# Altium PCB mchf_pro_trsv.PcbDoc
Units mil, origin at the board's own origin, x right, y up, seen from the top; angles counter-clockwise.
Board outline 3781.46 x 2216.74 mil, 2 copper layers (Top Layer, Bottom Layer); 16 components, 87 nets, 218 pads, 86 vias.
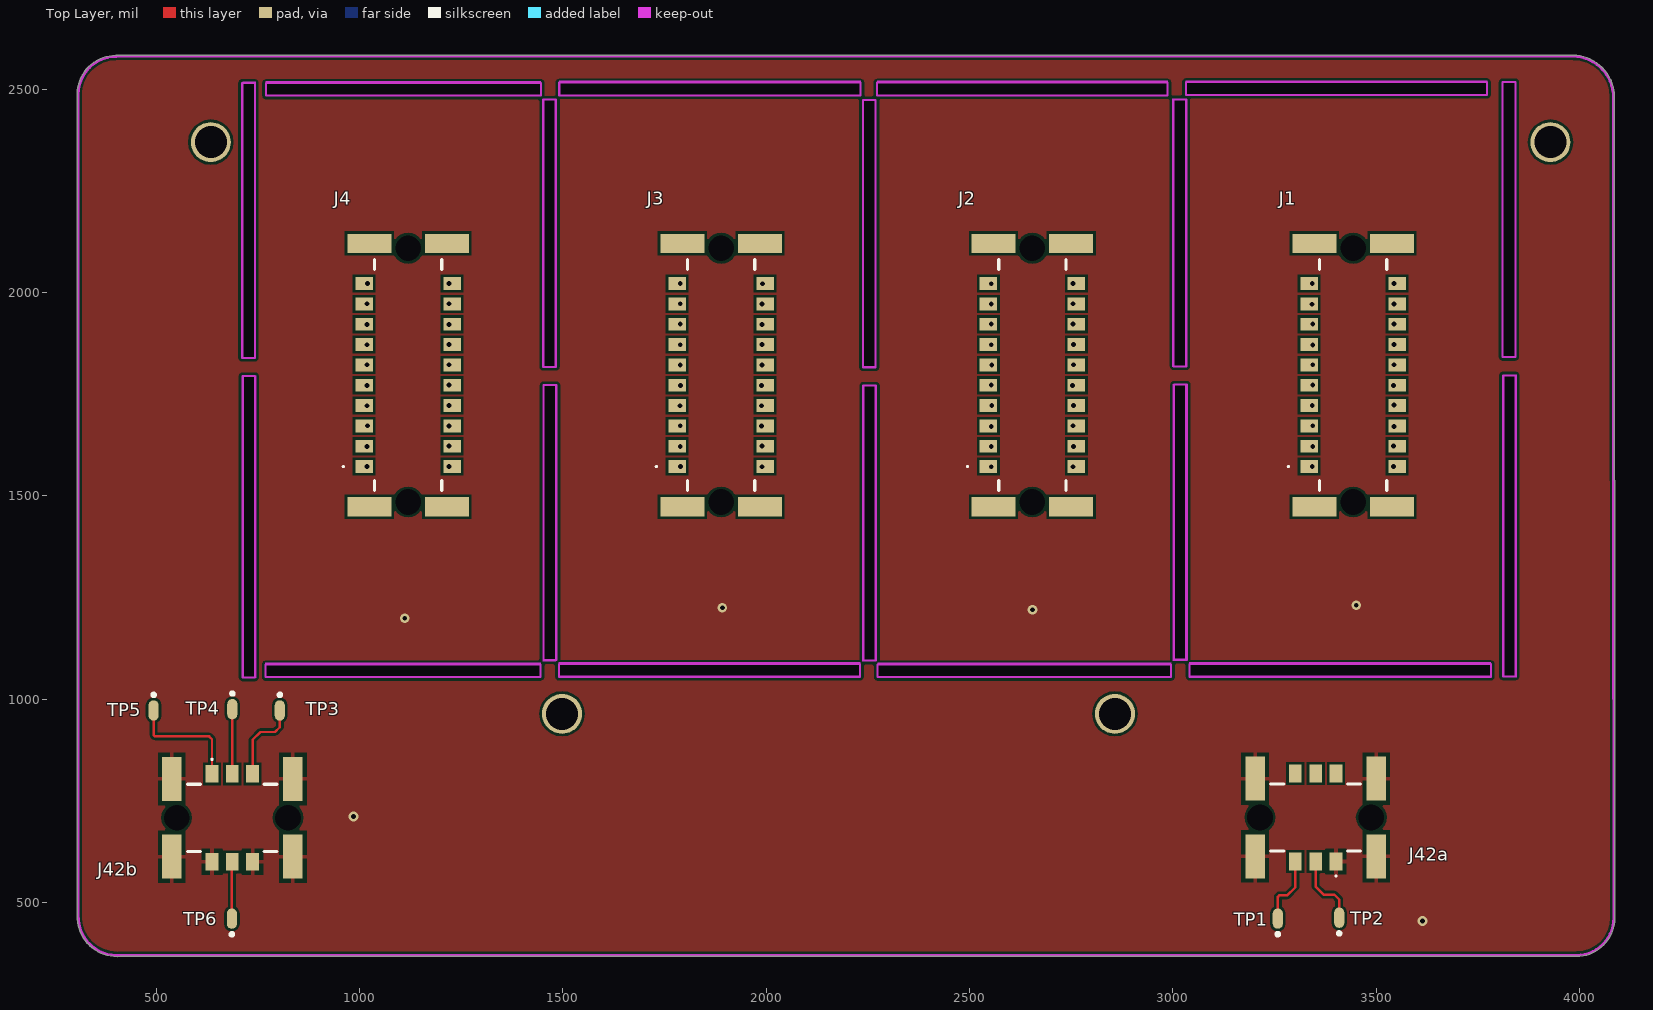
[diagram p0: Top Layer view]
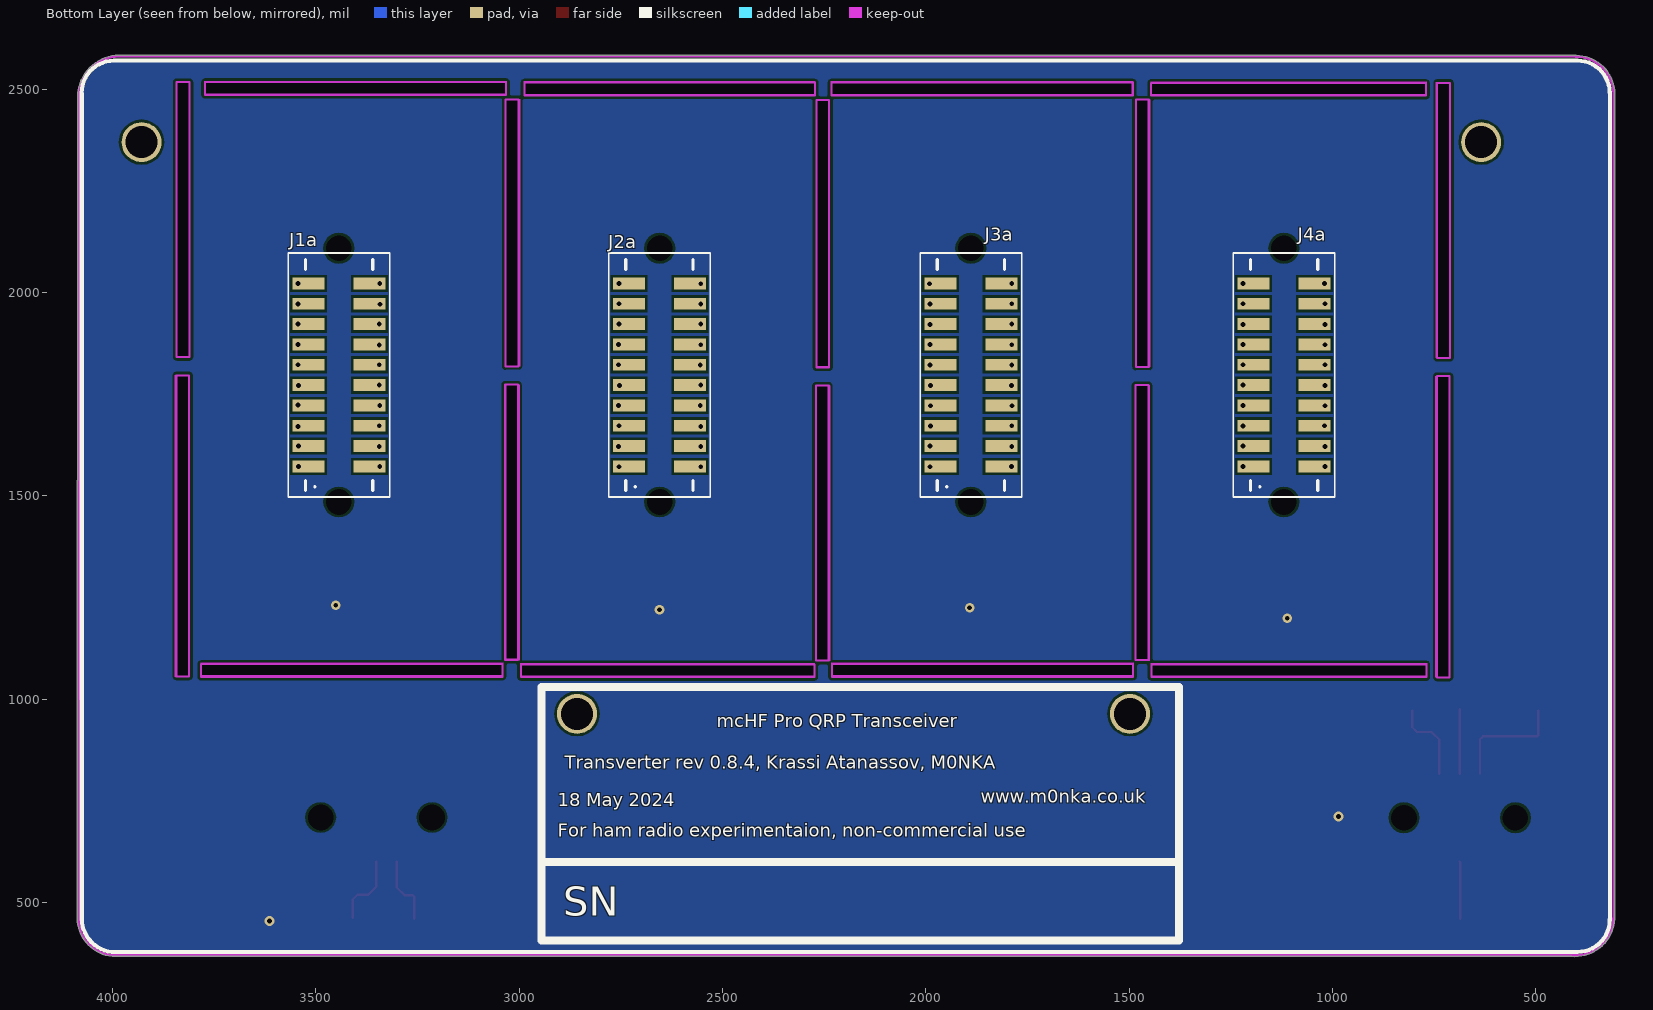
[diagram p1: Bottom Layer view, seen from below]

## Layer stack, top to bottom
Top Solder: solder mask 0.4, Solder Resist, Dk 3.5
Top Layer: signal copper 1.4
Dielectric1: core 12.6, FR-4, Dk 4.8
Bottom Layer: signal copper 1.4
Bottom Solder: solder mask 0.4, Solder Resist, Dk 3.5

## Board outline
305.51,467.41 cw(c308.52,467.62) 305.5,467.62 305.5,2487.11 cw(c308.52,2487.11) 305.51,2487.38 cw(c308.52,2487.63) 305.5,2487.64 cw(c401.3,2487.11) 400.87,2582.91 cw(c402.07,2580.14) 402.07,2583.16 3984,2583.43 cw(c3984.01,2580.42) 3984.04,2583.43 cw(c3982.79,2480.21) 4086.01,2480.21 cw(c3982.79,2480.21) 4085.99,2478.17 cw(c4082.98,2478.23) 4085.59,2476.72 4085.75,1985.34 cw(c4082.74,1985.34) 4085.75,1985.34 4085.9,1538.46 cw(c4083.56,1536.56) 4086.58,1536.56 4086.94,462.53 cw(c4083.95,462.19) 4086.96,462.2 cw(c3992.22,461.73) 4086.96,461.73 cw(c3992.22,461.73) 3992.69,366.99 cw(c3992.68,370) 3992.38,367 411.93,367 cw(c411.48,369.98) 411.72,366.98 cw(c403.84,465.02)
cut-out: 767.69,1087.83 767.69,1055.73 1445,1055.73 1445,1087.83
cut-out: 2999.17,1818 3031.27,1818 3031.27,2475 2999.17,2475
cut-out: 3000.17,1095.69 3032.27,1095.69 3032.27,1773 3000.17,1773
cut-out: 2236.17,1093.69 2268.27,1093.69 2268.27,1771 2236.17,1771
cut-out: 2237.41,1816 2269.51,1816 2269.51,2473 2237.41,2473
cut-out: 1449.17,1817 1481.27,1817 1481.27,2474 1449.17,2474
cut-out: 1450.17,1094.69 1482.27,1094.69 1482.27,1772 1450.17,1772
cut-out: 3032,2519.83 3032,2487.73 3773,2487.73 3773,2519.83
cut-out: 2273,2518.83 2273,2486.73 2987,2486.73 2987,2518.83
cut-out: 1491,2518.83 1491,2486.73 2232,2486.73 2232,2518.83
cut-out: 768.69,2517.83 768.69,2485.73 1446,2485.73 1446,2517.83
cut-out: 3041,1088.83 3041,1056.73 3782,1056.73 3782,1088.83
cut-out: 2274,1087.83 2274,1055.73 2996,1055.73 2996,1087.83
cut-out: 1490,1088.83 1490,1056.73 2231,1056.73 2231,1088.83
cut-out: 3842.59,2517.33 3810.49,2517.33 3810.49,1840.02 3842.59,1840.02
cut-out: 3845.83,1796 3813.73,1796 3813.73,1055 3845.83,1055
cut-out: 745.83,1794 713.73,1794 713.73,1053 745.83,1053
cut-out: 744.83,2516.31 712.73,2516.31 712.73,1839 744.83,1839

## Design rules (kind name [scope] priority, off if disabled: settings)
Clearance [All] p1: gap=6 ignorepadtopadclearanceinfootprint=FALSE except(0: Arc-Hole Track-Hole SMDPad-Hole THPad-Hole Via-Hole Fill-Hole Poly-Hole Region-Hole Text-Hole)
ComponentClearance [All] p1: gap=6 collisioncheckmode=3 verticalgap=10 showdistances=FALSE
DiffPairsRouting [All] p1: maxlimit=24 minlimit=6 mostfreqgap=6 toplayer_minwidth=6 toplayer_maxwidth=6 toplayer_prefwidth=6 bottomlayer_minwidth=6 bottomlayer_maxwidth=6 bottomlayer_prefwidth=6 maxuncoupledlength=500
HoleSize [All] p1: absolutevalues=TRUE maxlimit=6000 minlimit=11.81 maxpercent=80.000 minpercent=20.000
HoleToHoleClearance [All] p1: gap=6 allowstackedmicrovias=TRUE
MinimumSolderMaskSliver MinimumSolderMaskSliver_CN1 [InComponent('CN1')] p1: minsoldermaskwidth=6
MinimumSolderMaskSliver [All] p2: minsoldermaskwidth=6
PolygonConnect PolygonConnect_2 [InComponent('J211')] p1: connectstyle=Direct reliefconductorwidth=100 reliefentries=4 polygonreliefangle="90 Angle" airgapwidth=10
PolygonConnect PolygonConnect_1 [IsVia] p2: connectstyle=Direct reliefconductorwidth=10 reliefentries=4 polygonreliefangle="90 Angle" airgapwidth=10
PolygonConnect [All] p3: connectstyle=Relief reliefconductorwidth=10 reliefentries=4 polygonreliefangle="90 Angle" airgapwidth=10
RoomDefinition trsv_main [InComponentClass('trsv_main')] p1: confinementstyle=ConfineOut formatcopy=TRUE lockcomponents=FALSE outline 373,2770 970,2770 970,3074 373,3074
RoutingVias [All] p1: holewidth=15 width=30 viastyle="Through Hole" minholewidth=28 minwidth=50 maxholewidth=28 maxwidth=50
SilkToSilkClearance [All] p1: silktosilkclearance=5
SilkToSolderMaskClearance SilkscreenOverComponentPads [IsPad] p1: minsilkscreentomaskgap=0 clearancetoexposedcopper=TRUE
SolderMaskExpansion SolderMaskExpansion_1 [IsVia] p1: expansion=-15 istentingtop=FALSE
SolderMaskExpansion [All] p2: expansion=6 istentingtop=FALSE
Width Width_BLGND [InNet('BLGND')] p1: maxlimit=12 minlimit=12 preferedwidth=12
Width Width_BLVDD [InNet('BLVDD')] p2: maxlimit=12 minlimit=12 preferedwidth=12
Width Width_VDD [InNet('VDD')] p3: maxlimit=12 minlimit=12 preferedwidth=12
Width Width_C27_2 [InNet('NetC27_2')] p4: maxlimit=12 minlimit=12 preferedwidth=12
Width Width_LCD_BL_A [InNet('LCD_BL_A')] p5: maxlimit=12 minlimit=12 preferedwidth=12
Width Width_LCD_BL_K [InNet('LCD_BL_K')] p6: maxlimit=12 minlimit=12 preferedwidth=12
Width Width_D1_1 [InNet('NetD1_1')] p7: maxlimit=12 minlimit=12 preferedwidth=12
Width [All] p8: maxlimit=6 minlimit=6 preferedwidth=6
23 further rules are at their usual default settings.

## Components (designator, comment, footprint, x,y, rotation, side; value= is the part's Value field where it differs from the comment)
J1 "1373866" 1373866 3443.54,1796.71 r90 top locked
J1a "1373866" YuanQi4mm 3443,1797 r90 bottom locked
J2 "1373866" 1373866 2654.5,1796.71 r90 top locked
J2a "1373866" YuanQi4mm 2655,1797 r90 bottom locked
J3 "1373866" 1373866 1889.24,1796.71 r90 top locked
J3a "1373866" YuanQi4mm 1889,1797 r90 bottom locked
J4 "1373866" 1373866 1119.36,1796.71 r90 top locked
J4a "1373866" YuanQi4mm 1118.94,1797 r90 bottom locked
J42a "1373826" 1373826 3351.29,708.72 r180 top locked
J42b "1373826" 1373826 687,708 r0 top locked
TP1 "TP" TP 3258,461 r270 top
TP2 "TP" TP 3409,463 r270 top
TP3 "TP" TP 804,971 r90 top
TP4 "TP" TP 687.22,974.14 r90 top
TP5 "TP" TP 493.59,971 r90 top
TP6 "TP" TP 685.78,460.86 r270 top

## Footprints (in the part's own frame and the unit in brackets; to place one, negate y for a bottom-side part, rotate by r counter-clockwise, add the part's x,y. Pads: shape width x height; smd on the part's side, far side on the other; paste and mask are expansions set on the pad)
1373826 [mm]
  rect 0.8x1.1 smd: A1(-1.27,2.75) A2(0,2.75) A3(1.27,2.75) B1(-1.27,-2.75) B2(0,-2.75) B3(1.27,-2.75)
  round 0.8 hole 1.6 unplated: MH1(-3.48,0) MH2(3.48,0)
  rect 1.2x2.75 smd: MP1(-3.78,2.425) MP2(-3.78,-2.425) MP3(3.78,-2.425) MP4(3.78,2.425)
  silkscreen extent -2.8,-2.1 2.8,3.7
1373866 [mm]
  rect 0.8x1.1 smd: A1(-5.715,2.75) A2(-4.445,2.75) A3(-3.175,2.75) A4(-1.905,2.75) A5(-0.635,2.75) A6(0.635,2.75) A7(1.905,2.75) A8(3.175,2.75) A9(4.445,2.75) A10(5.715,2.75) A11(-5.715,-2.75) A12(-4.445,-2.75) A13(-3.175,-2.75) A14(-1.905,-2.75) A15(-0.635,-2.75) A16(0.635,-2.75) A17(1.905,-2.75) A18(3.175,-2.75) A19(4.445,-2.75) A20(5.715,-2.75)
  round 0.8 hole 1.6 unplated: MH1(-7.925,0) MH2(7.925,0)
  rect 1.2x2.75 smd: MP1(-8.225,2.425) MP2(8.225,2.425) MP3(-8.225,-2.425) MP4(8.225,-2.425)
  silkscreen extent -7.2,-2.1 7.2,4.1
TP [mil]
  oval 50x25 smd: 1(0.86,0.22)
  silkscreen extent 36,-3 42,3
YuanQi4mm [mm] "Board To Board 1.27mm pitch 20pin 4mm stack"
  rect 0.74x2 smd: A1(-5.715,1.905) A2(-4.445,1.905) A3(-3.175,1.905) A4(-1.905,1.905) A5(-0.635,1.905) A6(0.635,1.905) A7(1.905,1.905) A8(3.175,1.905) A9(4.445,1.905) A10(5.715,1.905) A11(-5.715,-1.905) A12(-4.445,-1.905) A13(-3.175,-1.905) A14(-1.905,-1.905) A15(-0.635,-1.905) A16(0.635,-1.905) A17(1.905,-1.905) A18(3.175,-1.905) A19(4.445,-1.905) A20(5.715,-1.905)
  silkscreen extent -7.62,-3.18 7.62,3.18

## Part data
J1 J2 J3 J4: "SMD male connector, nominal current: 2.2 A, Test voltage: 840 VAC, number of positions: 20, pitch: 1.27 mm, color: black, contact surface: Gold, type of contact: Male connector, mounting: SMD soldering", Manufacturer_Name="Phoenix Contact", Mouser Part Number=651-1373866, Datasheet Link=http://www.phoenixcontact.com/gb/produkte/1373866, Geometry.Height=6.75mm, Manufacturer_Part_Number=1373866, Mouser Price/Stock=https://www.mouser.co.uk/ProductDetail/Phoenix-Contact/1373866?qs=2SLPxufLcgAs0enIXKjUUw%3D%3D
J1a J2a J3a J4a: library part YQ_20p, "SMD male connector, nominal current: 2.2 A, Test voltage: 840 VAC, number of positions: 20, pitch: 1.27 mm, color: black, contact surface: Gold, type of contact: Male connector, mounting: SMD soldering", Manufacturer_Name="Phoenix Contact", Mouser Part Number=651-1373866, Datasheet Link=http://www.phoenixcontact.com/gb/produkte/1373866, Geometry.Height=6.75mm, Manufacturer_Part_Number=1373866, Mouser Price/Stock=https://www.mouser.co.uk/ProductDetail/Phoenix-Contact/1373866?qs=2SLPxufLcgAs0enIXKjUUw%3D%3D
J42a J42b: "SMD male connector, nominal current: 2.2 A, Test voltage: 840 VAC, number of positions: 6, pitch: 1.27 mm, color: black, contact surface: Gold, type of contact: Male connector, mounting: SMD soldering", Manufacturer_Name="Phoenix Contact", Mouser Part Number=651-1373826, Datasheet Link=http://www.phoenixcontact.com/gb/produkte/1373826, Geometry.Height=6.75mm, Manufacturer_Part_Number=1373826, Mouser Price/Stock=https://www.mouser.co.uk/ProductDetail/Phoenix-Contact/1373826?qs=2SLPxufLcgB13Clq%252BEBMrA%3D%3D

## Free pads (board coordinates)
  round 98.43 hole 78.74: 1(634.15,2369.62) 1(1497.96,963.6) 1(2857.62,963.6) 1(3928.57,2369.62)

## Via types
v1: diameter 24, hole 12, Top Layer to Bottom Layer, 86 vias

## Nets (pads, with @x,y where several pads share a name; then routed paths per layer and width w, separated by ;. In a path a pad name is that pad's centre, name@x,y a point inside that pad or via, vN(x,y) a via of type N, cw(c..) or ccw(c..) an arc to the next point about the centre after c; other vN are vias at no path point)
GND: J42a.A1 J42a.MP1 J42a.MP2 J42a.MP3 J42a.MP4 J42b.B1 J42b.B3 J42b.MP1 J42b.MP2 J42b.MP3 J42b.MP4
  other v1: 3614,454 985,711 1111.12,1198.62 2655.12,1219.62 1892.12,1224.62 3451.12,1230.62
J1_0: J1.A10 J1a.A20
  other v1: 3343,2022
J1_1: J1.A9 J1a.A19
  other v1: 3342,1971
J1_2: J1.A8 J1a.A18
  other v1: 3344,1922
J1_3: J1.A7 J1a.A17
  other v1: 3344,1871
J1_4: J1.A6 J1a.A16
  other v1: 3344,1822
J1_5: J1.A5 J1a.A15
  other v1: 3344,1772
J1_6: J1.A4 J1a.A14
  other v1: 3343,1722
J1_7: J1.A3 J1a.A13
  other v1: 3344,1672
J1_8: J1.A2 J1a.A12
  other v1: 3344,1621
J1_9: J1.A1 J1a.A11
  other v1: 3343,1572
J2_0: J2.A10 J2a.A20
  other v1: 2553.54,2021.24
J2_1: J2.A9 J2a.A19
  other v1: 2553.54,1971.24
J2_2: J2.A8 J2a.A18
  other v1: 2553.54,1922.24
J2_3: J2.A7 J2a.A17
  other v1: 2553.54,1871.24
J2_4: J2.A6 J2a.A16
  other v1: 2554.54,1821.24
J2_5: J2.A5 J2a.A15
  other v1: 2553.54,1772.24
J2_6: J2.A4 J2a.A14
  other v1: 2554.54,1722.24
J2_7: J2.A3 J2a.A13
  other v1: 2553.54,1670.24
J2_8: J2.A2 J2a.A12
  other v1: 2553.54,1621.24
J2_9: J2.A1 J2a.A11
  other v1: 2553.54,1571.24
J3_0: J3.A10 J3a.A20
  other v1: 1788.54,2022.24
J3_1: J3.A9 J3a.A19
  other v1: 1788.54,1972.24
J3_2: J3.A8 J3a.A18
  other v1: 1788.54,1922.24
J3_3: J3.A7 J3a.A17
  other v1: 1788.54,1871.24
J3_4: J3.A6 J3a.A16
  other v1: 1788.54,1821.24
J3_5: J3.A5 J3a.A15
  other v1: 1789.54,1771.24
J3_6: J3.A4 J3a.A14
  other v1: 1787.54,1721.24
J3_7: J3.A3 J3a.A13
  other v1: 1788.54,1672.24
J3_8: J3.A2 J3a.A12
  other v1: 1788.54,1621.24
J3_9: J3.A1 J3a.A11
  other v1: 1789.54,1572.24
J4_0: J4.A10 J4a.A20
  other v1: 1019.54,2022.24
J4_1: J4.A9 J4a.A19
  other v1: 1018.54,1972.24
J4_2: J4.A8 J4a.A18
  other v1: 1018.54,1921.24
J4_3: J4.A7 J4a.A17
  other v1: 1018.54,1871.24
J4_4: J4.A6 J4a.A16
  other v1: 1018.54,1822.24
J4_5: J4.A5 J4a.A15
  other v1: 1018.54,1771.24
J4_6: J4.A4 J4a.A14
  other v1: 1018.54,1721.24
J4_7: J4.A3 J4a.A13
  other v1: 1019.54,1672.24
J4_8: J4.A2 J4a.A12
  other v1: 1018.54,1621.24
J4_9: J4.A1 J4a.A11
  other v1: 1018.54,1572.24
NetJ1_A11: J1.A11 J1a.A1
  other v1: 3543,1572
NetJ1_A12: J1.A12 J1a.A2
  other v1: 3543,1622
NetJ1_A13: J1.A13 J1a.A3
  other v1: 3544.24,1670.64
NetJ1_A14: J1.A14 J1a.A4
  other v1: 3544,1723
NetJ1_A15: J1.A15 J1a.A5
  other v1: 3543,1771
NetJ1_A16: J1.A16 J1a.A6
  other v1: 3544,1822
NetJ1_A17: J1.A17 J1a.A7
  other v1: 3544,1872
NetJ1_A18: J1.A18 J1a.A8
  other v1: 3544,1922
NetJ1_A19: J1.A19 J1a.A9
  other v1: 3544,1972
NetJ1_A20: J1.A20 J1a.A10
  other v1: 3544,2022
NetJ2_A11: J2.A11 J2a.A1
  other v1: 2754.54,1571.24
NetJ2_A12: J2.A12 J2a.A2
  other v1: 2755.54,1621.24
NetJ2_A13: J2.A13 J2a.A3
  other v1: 2754.54,1672.24
NetJ2_A14: J2.A14 J2a.A4
  other v1: 2755.54,1722.24
NetJ2_A15: J2.A15 J2a.A5
  other v1: 2753.54,1771.24
NetJ2_A16: J2.A16 J2a.A6
  other v1: 2755.54,1822.24
NetJ2_A17: J2.A17 J2a.A7
  other v1: 2755.54,1872.24
NetJ2_A18: J2.A18 J2a.A8
  other v1: 2754.54,1922.24
NetJ2_A19: J2.A19 J2a.A9
  other v1: 2754.54,1972.24
NetJ2_A20: J2.A20 J2a.A10
  other v1: 2754.54,2022.24
NetJ3_A11: J3.A11 J3a.A1
  other v1: 1989.54,1571.24
NetJ3_A12: J3.A12 J3a.A2
  other v1: 1989.54,1622.24
NetJ3_A13: J3.A13 J3a.A3
  other v1: 1988.54,1671.24
NetJ3_A14: J3.A14 J3a.A4
  other v1: 1988.54,1721.24
NetJ3_A15: J3.A15 J3a.A5
  other v1: 1988.54,1771.24
NetJ3_A16: J3.A16 J3a.A6
  other v1: 1989.54,1821.24
NetJ3_A17: J3.A17 J3a.A7
  other v1: 1989.54,1872.24
NetJ3_A18: J3.A18 J3a.A8
  other v1: 1989.54,1921.24
NetJ3_A19: J3.A19 J3a.A9
  other v1: 1989.54,1971.24
NetJ3_A20: J3.A20 J3a.A10
  other v1: 1990.54,2021.24
NetJ4_A11: J4.A11 J4a.A1
  other v1: 1219.54,1572.24
NetJ4_A12: J4.A12 J4a.A2
  other v1: 1219.54,1622.24
NetJ4_A13: J4.A13 J4a.A3
  other v1: 1219.54,1671.24
NetJ4_A14: J4.A14 J4a.A4
  other v1: 1219.54,1722.24
NetJ4_A15: J4.A15 J4a.A5
  other v1: 1219.54,1772.24
NetJ4_A16: J4.A16 J4a.A6
  other v1: 1219.54,1822.24
NetJ4_A17: J4.A17 J4a.A7
  other v1: 1219.54,1872.24
NetJ4_A18: J4.A18 J4a.A8
  other v1: 1219.54,1921.24
NetJ4_A19: J4.A19 J4a.A9
  other v1: 1219.54,1972.24
NetJ4_A20: J4.A20 J4a.A10
  other v1: 1219.54,2022.24
NetJ42a_A2: J42a.A2 TP2.1 | length 177.5
  Top Layer w6: J42a.A2 3351.29,538.71 3371,519 3397,519 3409.22,506.78 TP2.1
NetJ42a_A3: J42a.A3 TP1.1 | length 169.4
  Top Layer w6: TP1.1 3258.22,513.49 3261.74,517 3281,517 3301.29,537.29 J42a.A3
NetJ42b_A1: J42b.A1 TP5.1 | length 293.1
  Top Layer w6: TP5.1 493.37,911.51 496.89,908 630,908 637,901 J42b.A1
NetJ42b_A2: J42b.A2 TP4.1 | length 158.7
  Top Layer w6: J42b.A2 TP4.1
NetJ42b_A3: J42b.A3 TP3.1 | length 204.3
  Top Layer w6: J42b.A3 737,900 756,919 792,919 803.78,930.78 TP3.1
NetJ42b_B2: J42b.B2 TP6.1 | length 140.1
  Top Layer w6: TP6.1 686,598.73 J42b.B2
pads on no net: J1.MH1 J1.MH2 J1.MP1 J1.MP2 J1.MP3 J1.MP4 J2.MH1 J2.MH2 J2.MP1 J2.MP2 J2.MP3 J2.MP4 J3.MH1 J3.MH2 J3.MP1 J3.MP2 J3.MP3 J3.MP4 J4.MH1 J4.MH2 J4.MP1 J4.MP2 J4.MP3 J4.MP4 J42a.B1 J42a.B2 J42a.B3 J42a.MH1 J42a.MH2 J42b.MH1 J42b.MH2

## Polygon pours and split planes (outlines as drawn)
GND on Bottom Layer "GND_L02_P001" (solid, remove dead copper, pour order 1): 306,362.67 4082.16,375.82 4085.77,2587.79 2197.01,2582.91 306,2578.01
GND on Top Layer "GND_L01_P000" (solid, remove dead copper, pour order 0): 304,2582.91 304,368 4085.59,368 4085.59,2582.91

## Keep-outs
Keep-Out Layer:
  lines w5: 710.76,1839 742.32,1839 742.32,2515.33 710.76,2515.33 710.76,1839 ; 711.76,1053 711.76,1794 743.32,1794 743.32,1053 711.76,1053 ; 768.67,1053.76 768.67,1085.32 1445,1085.32 1445,1053.76 768.67,1053.76 ; 769.67,2483.76 769.67,2515.32 1446,2515.32 1446,2483.76 769.67,2483.76 ; 1451.68,1817 1451.68,2474 1483.24,2474 1483.24,1817 1451.68,1817 ; 1452.68,1095.67 1484.24,1095.67 1484.24,1772 1452.68,1772 1452.68,1095.67 ; 1490,1054.76 2231,1054.76 2231,1086.32 1490,1086.32 1490,1054.76 ; 1491,2484.76 2232,2484.76 2232,2516.32 1491,2516.32 1491,2484.76 ; 2237.68,1816 2269.24,1816 2269.24,2473 2237.68,2473 2237.68,1816 ; 2238.68,1094.67 2238.68,1771 2270.24,1771 2270.24,1094.67 2238.68,1094.67 ; 2273,2484.76 2273,2516.32 2987,2516.32 2987,2484.76 2273,2484.76 ; 2274,1053.76 2274,1085.32 2996,1085.32 2996,1053.76 2274,1053.76 ; 3001.68,1818 3033.24,1818 3033.24,2475 3001.68,2475 3001.68,1818 ; 3002.68,1096.67 3002.68,1773 3034.24,1773 3034.24,1096.67 3002.68,1096.67 ; 3032,2485.76 3773,2485.76 3773,2517.32 3032,2517.32 3032,2485.76 ; 3041,1054.76 3782,1054.76 3782,1086.32 3041,1086.32 3041,1054.76 ; 3810.76,1841 3810.76,2517.33 3842.32,2517.33 3842.32,1841 3810.76,1841 ; 3811.76,1055 3843.32,1055 3843.32,1796 3811.76,1796 3811.76,1055
  lines w6: 308.52,467.62 308.52,2487.11 ; 308.52,2487.63 cw(c401.3,2487.11) 401.81,2579.89 ; 308.53,467.62 ccw(c403.84,465.02) 411.48,369.98 ; 402.07,2580.14 3984.01,2580.42 cw(c3982.79,2480.21) 4082.98,2478.23 ; 409.42,370.02 3992.54,370.02 ; 3992.68,370 ccw(c3992.22,461.73) 4083.95,462.19 ; 4082.57,2478.23 4082.74,1985.34 4082.89,1537.5 ; 4083.56,1536.56 4083.93,461.24

## Silkscreen, mask and mechanical layers (free items; w line width, h text height)
Bottom Overlay:
  lines w10: 317.71,457.29 317.71,2488.71 ; 318,457.55 ccw(c397.28,457.28) 397,378 ; 318,2491 cw(c397.28,2490.72) 397.55,2570 ; 397.69,377.87 3992.62,377.87 ; 399.15,2570.15 3997,2570.15 ; 3992.33,377.44 ccw(c3992.62,460.53) 4075.71,460.24 ; 3997,2570 cw(c3996.72,2490.72) 4076,2490.45 ; 4075.71,460.53 4075.71,2489
  lines w20: 1377.42,598.84 1377.42,406.54 2945.08,406.54 2945.08,598.21 ; 1376.92,599 1376.92,1030 2944.92,1030 2944.92,599 1376.92,599
  text "mcHF Pro QRP Transceiver" at 2514,931 h32
  text "Transverter rev 0.8.4, Krassi Atanassov, M0NKA" at 2888,829 h32
  text "www.m0nka.co.uk" at 1865,745 h32
  text "18 May 2024" at 2905,736 h32
  text "For ham radio experimentaion, non-commercial use" at 2905,661 h32
  text "SN" at 2892,467 h72
Mechanical 1:
  lines w10: 704,1045.52 704,2525 3851,2525 3851,1045.52 704,1045.52

## Dimensions
308.52,2487.11 to 4082.74,1985.34 on Mechanical 1
409.42,370.02 to 402.07,2580.14 on Mechanical 1